# Altium PCB Remute-RF-FT.PcbDoc
Units mm, origin at the board's own origin, x right, y up, seen from the top; angles counter-clockwise.
Board outline 40 x 40 mm, 2 copper layers (Top Layer, Bottom Layer); 26 components, 25 nets, 70 pads, 0 vias.
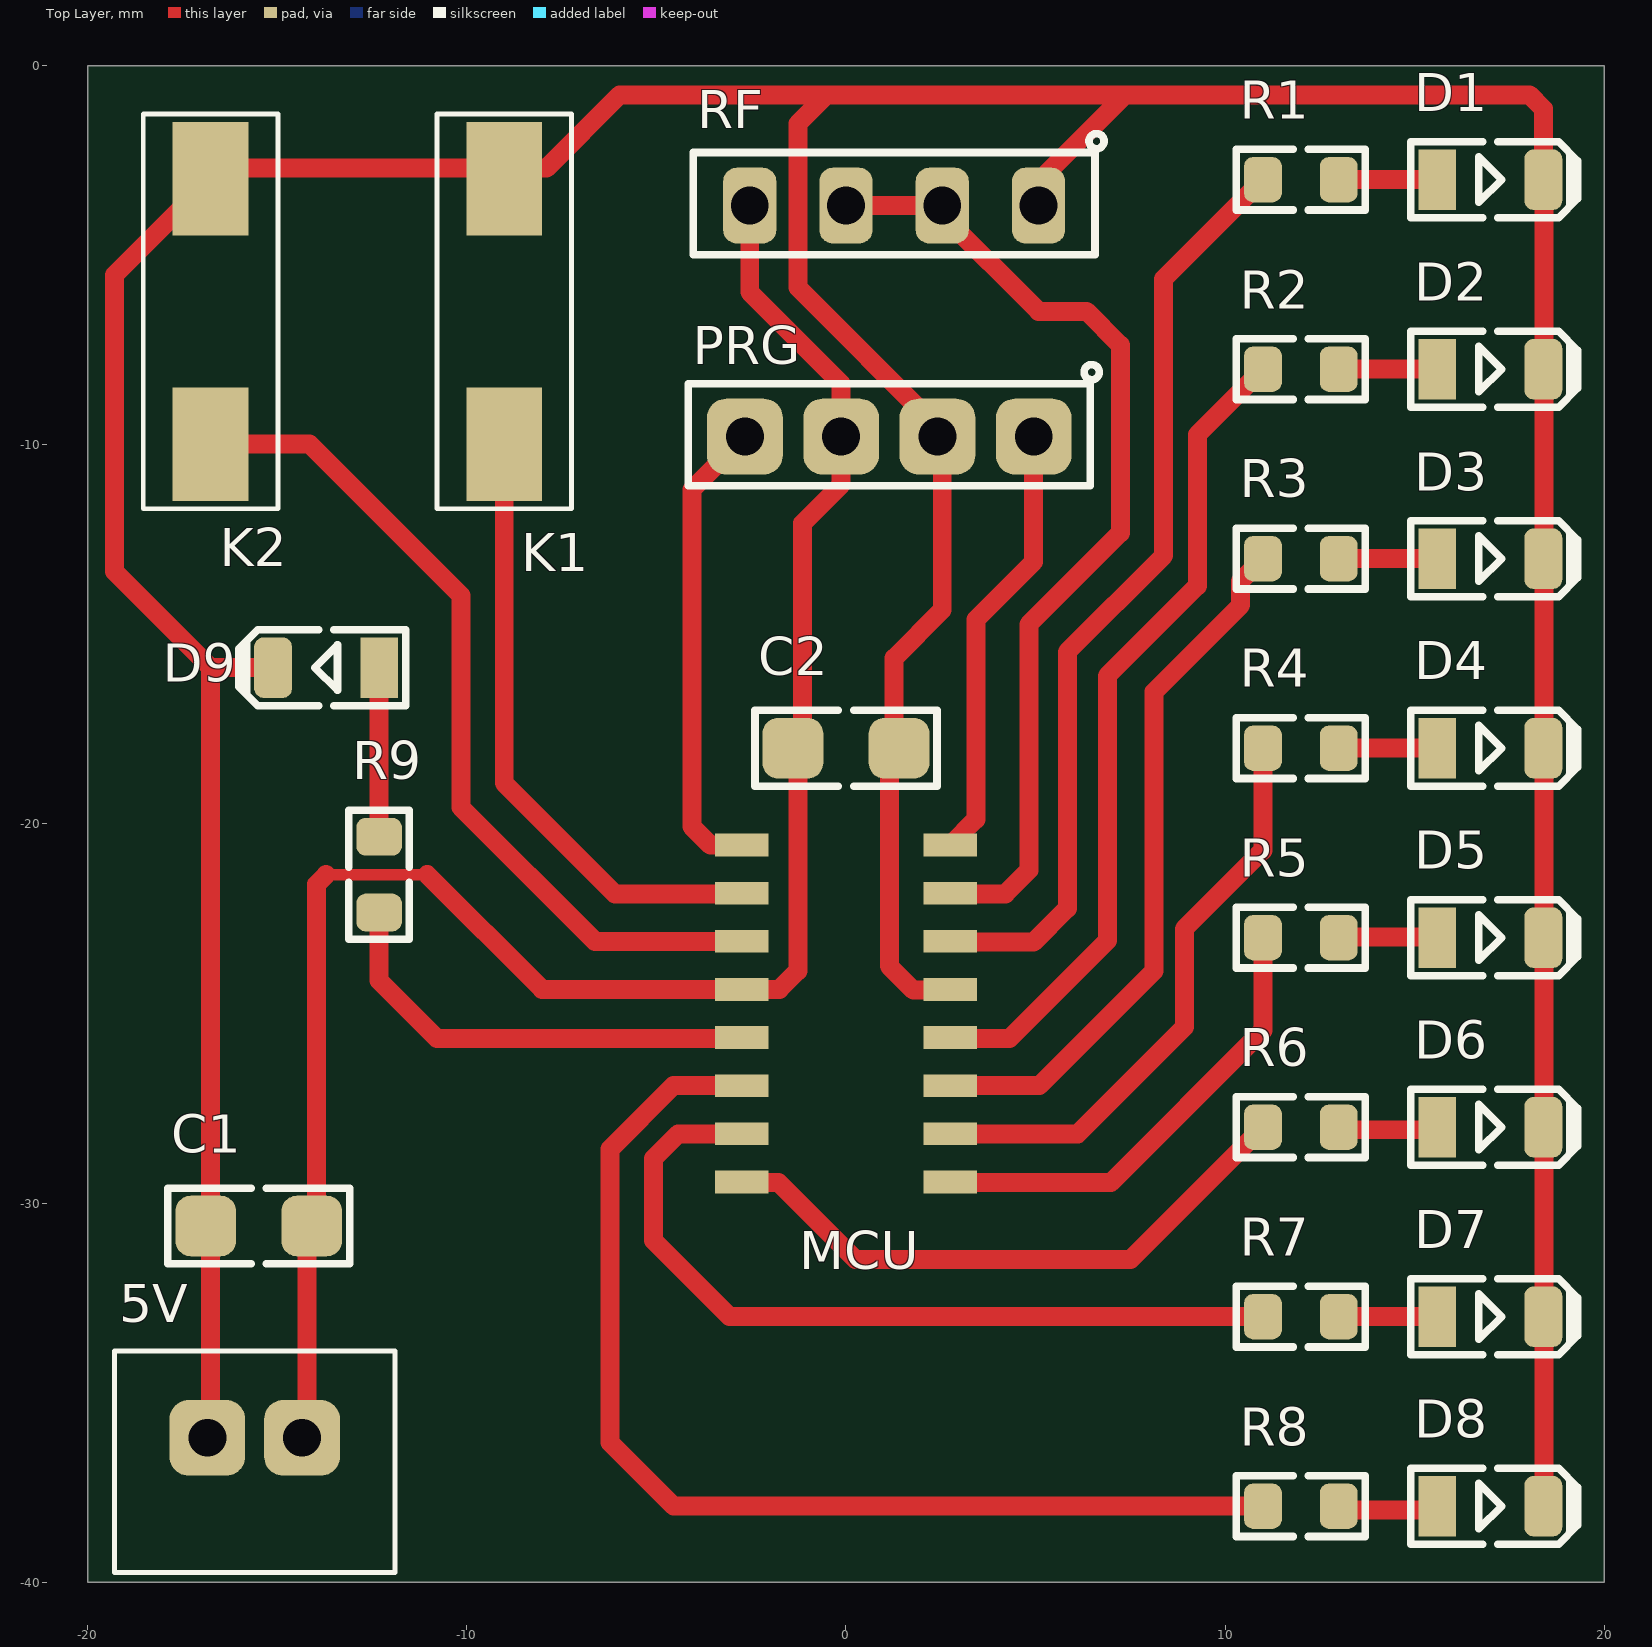
[diagram p0: Top Layer view]
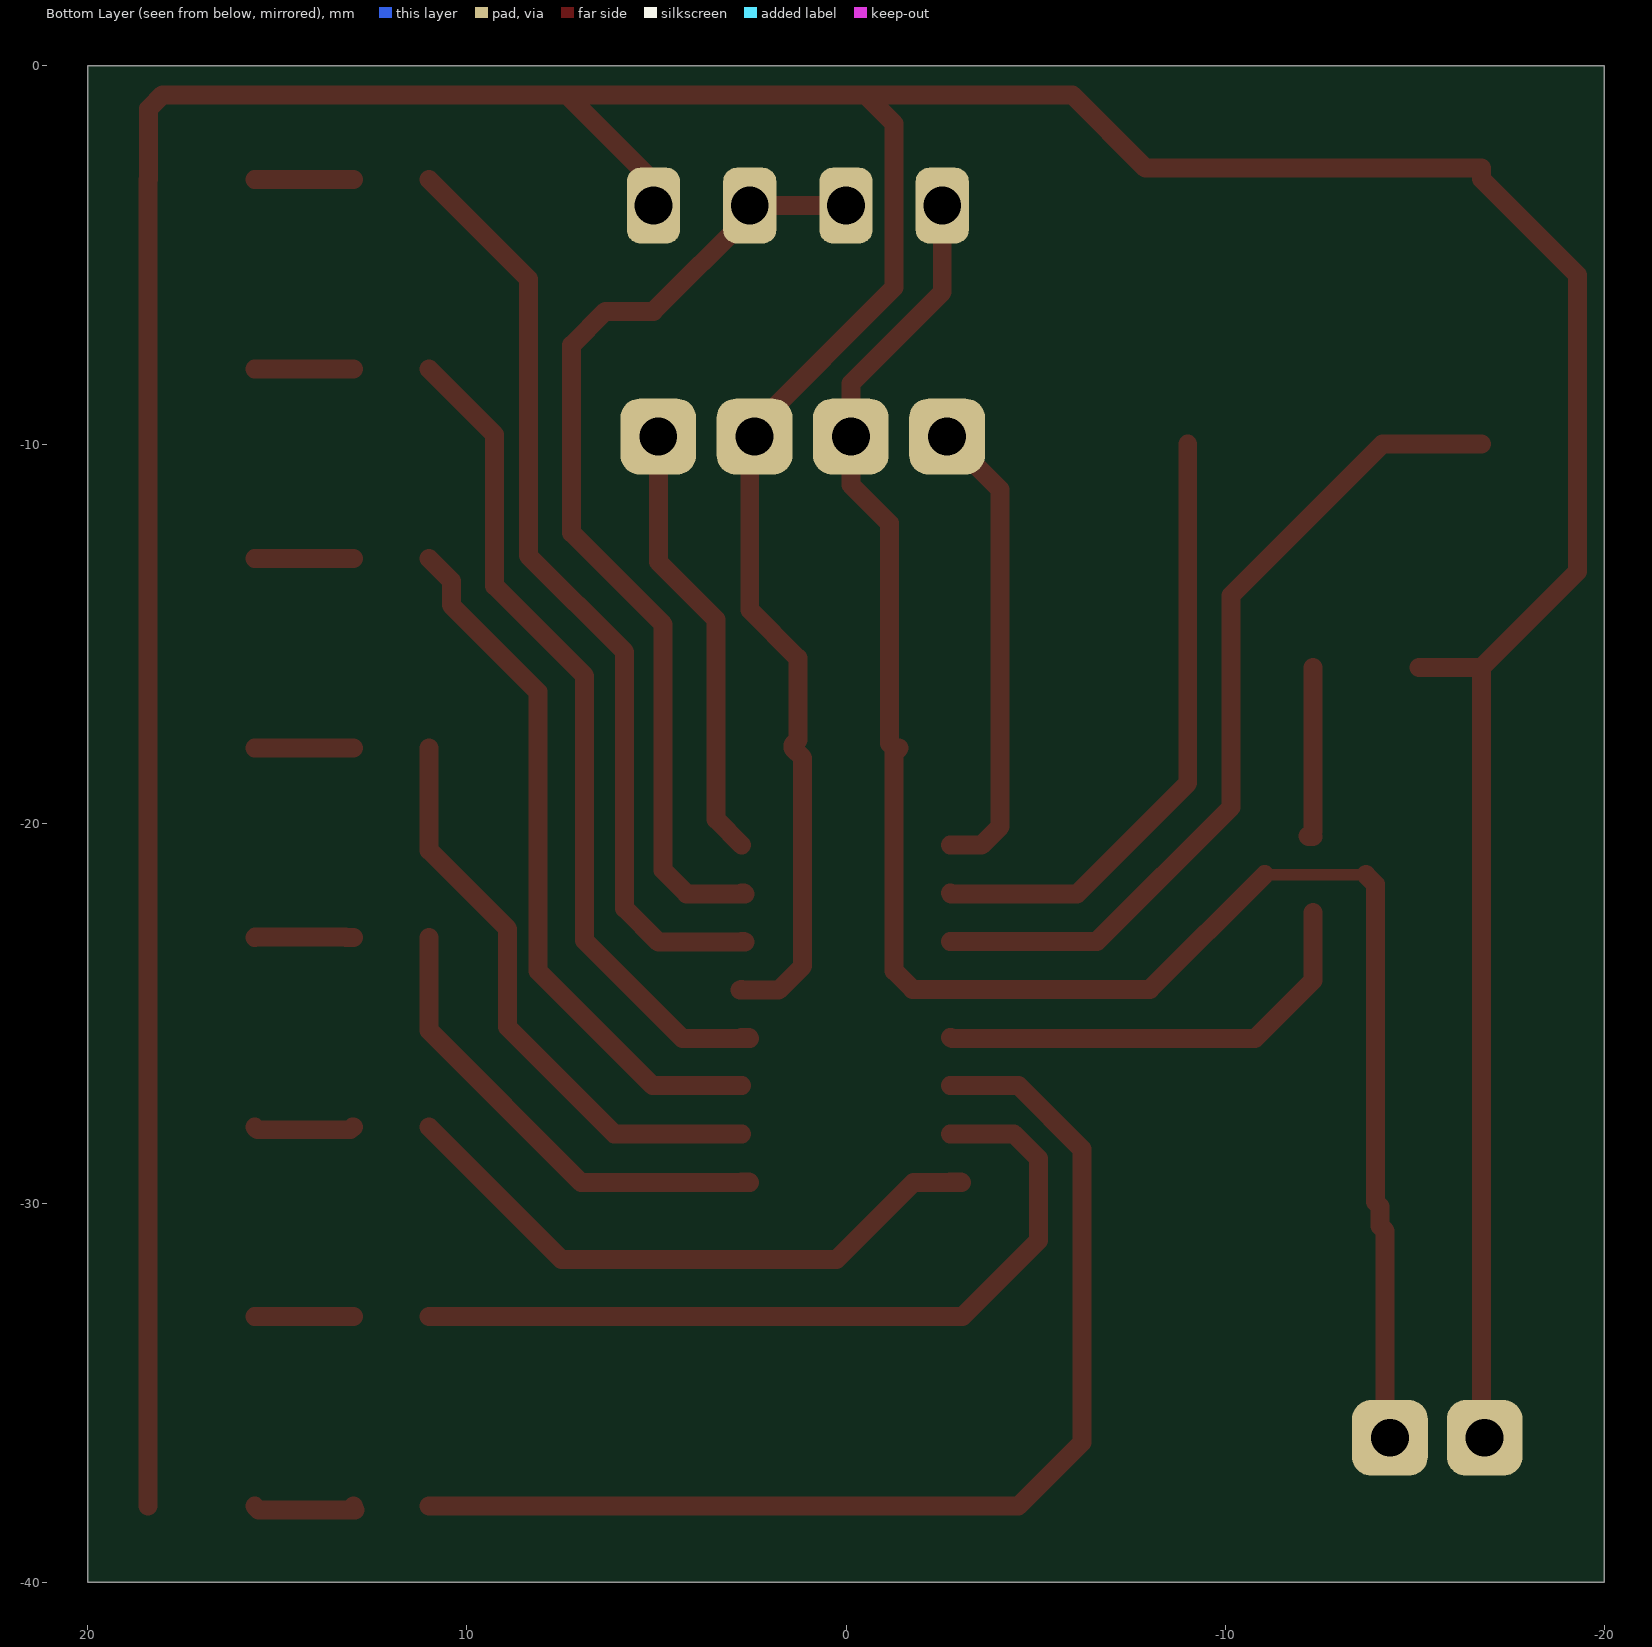
[diagram p1: Bottom Layer view, seen from below]

## Layer stack, top to bottom
Top Solder: solder mask 0.0102, Solder Resist, Dk 3.5
Top Layer: signal copper 0.0356
Dielectric 1: dielectric 0.32, FR-4, Dk 4.8
Bottom Layer: signal copper 0.0356
Bottom Solder: solder mask 0.0102, Solder Resist, Dk 3.5

## Board outline
-20,-40 20,-40 20,0 -20,0

## Design rules (kind name [scope] priority, off if disabled: settings)
Clearance [All] p1: gap=0.3 ignorepadtopadclearanceinfootprint=FALSE
PolygonConnect [All] p1: connectstyle=Relief reliefconductorwidth=0.254 reliefentries=4 polygonreliefangle="90 Angle" airgapwidth=0.254
RoutingVias [All] p1: holewidth=0.711 width=1.27 viastyle="Through Hole" minholewidth=0.711 minwidth=1.27 maxholewidth=0.711 maxwidth=1.27
SolderMaskExpansion [All] p1: expansion=0.102 istentingtop=FALSE
Width [All] p1: maxlimit=0.5 minlimit=0.254 preferedwidth=0.3 toplayer_minwidth=0.3 bottomlayer_maxwidth=0.254 bottomlayer_prefwidth=0.254 minimp=50.000000 maximp=50.000000 favimp=50.000000
30 further rules are at their usual default settings.

## Components (designator, comment, footprint, x,y, rotation, side; value= is the part's Value field where it differs from the comment)
5V "XH 2" "XH 2 PIN ( White )" -15.601,-36.195 r0 top
C1 "Capacitor SMD 1206" C1206 -15.494,-30.607 r0 top value=100uF
C2 "Capacitor SMD 1206" C1206 0,-18 r180 top value=100nF
D1 "LED SMD 1206" "LED SMD 1206 (Blue)" 17,-3 r0 top
D2 "LED SMD 1206" "LED SMD 1206 (Blue)" 17,-8 r0 top
D3 "LED SMD 1206" "LED SMD 1206 (Blue)" 17,-13 r0 top
D4 "LED SMD 1206" "LED SMD 1206 (Blue)" 17,-18 r0 top
D5 "LED SMD 1206" "LED SMD 1206 (Blue)" 17,-23 r0 top
D6 "LED SMD 1206" "LED SMD 1206 (Blue)" 17,-28 r0 top
D7 "LED SMD 1206" "LED SMD 1206 (Blue)" 17,-33 r0 top
D8 "LED SMD 1206" "LED SMD 1206 (Blue)" 17,-38 r0 top
D9 "LED SMD 1206" "LED SMD 1206 (Blue)" -13.716,-15.875 r180 top
K1 "Button" BUTTON -9.017,-6.477 r90 top
K2 "Button" BUTTON -16.764,-6.477 r90 top
MCU "FT60E023" SSOP-16 0,-25 r0 top
PRG "Female Header Single 4" HDR_F_1X4#1 1.143,-9.779 r180 top
R1 "Resistor SMD 0805" R0805 12,-3 r0 top value=1K
R2 "Resistor SMD 0805" R0805 12,-8 r0 top value=1K
R3 "Resistor SMD 0805" R0805 12,-13 r0 top value=1K
R4 "Resistor SMD 0805" R0805 12,-18 r0 top value=1K
R5 "Resistor SMD 0805" R0805 12,-23 r0 top value=1K
R6 "Resistor SMD 0805" R0805 12,-28 r0 top value=1K
R7 "Resistor SMD 0805" R0805 12,-33 r0 top value=1K
R8 "Resistor SMD 0805" R0805 12,-38 r0 top value=1K
R9 "Resistor SMD 0805" R0805 -12.319,-21.336 r90 top value=1K
RF "Female Header Single 4" HDR_F_1X4#2 1.27,-3.683 r180 top

## Footprints (in the part's own frame and the unit in brackets; to place one, negate y for a bottom-side part, rotate by r counter-clockwise, add the part's x,y. Pads: shape width x height; smd on the part's side, far side on the other; paste and mask are expansions set on the pad)
BUTTON [mm] "KEY"
  rect 3x2 smd: 1(-3.5,0) 2(3.5,0)
  silkscreen extent -5.21,-1.78 5.21,1.78, body extent -5,-1.75 5,1.75, height 4.35
C1206 [mm] "CHIP Capacitor, 3.2X1.6mm, 1206 (Make www.tarahiboard.com)"
  rrect50% 1.6x1.6 smd mask+0.075: 1(-1.4,0) 2(1.4,0)
  silkscreen extent -2.4,-1 2.4,1, body extent -1.6,-0.8 1.6,0.8, height 1
HDR_F_1X4#1 [mm] "HEADER FEMALE pitch: 2.54mm (Make www.tarahiboard.com)"
  rrect50% 2x2 hole 1 mask+0.1: 1(-3.81,0) 2(-1.27,0) 3(1.27,0) 4(3.81,0)
  silkscreen extent -5.54,-1.9 5.3,1.3, body extent -5.2,-1.3 5.21,1.2, height 8.5
HDR_F_1X4#2 [mm] "HEADER FEMALE pitch: 2.54mm (Make www.tarahiboard.com)"
  rrect50% 1.4x2 hole 1 mask+0.1: 1(-3.81,0) 2(-1.27,0) 3(1.27,0) 4(3.81,0)
  silkscreen extent -5.54,-1.9 5.3,1.3, body extent -5.2,-1.3 5.21,1.2, height 8.5
"LED SMD 1206 (Blue)" [mm] "(Make www.tarahiboard.com)"
  rect 1x1.6 smd mask+0.075: 1(-1.4,0)
  rrect50% 1x1.6 smd mask+0.075: 2(1.4,0)
  silkscreen extent -2.1,-1 2.3,1, body extent -1.6,-0.8 1.6,0.8, height 0.68
R0805 [mm] "CHIP RESISTOR 1/8 WATT ,2.0X1.3mm, 0805, 2012 (Make www.tarahiboard.com)"
  rrect50% 1x1.2 smd mask+0.05: 1(-1,0) 2(1,0)
  Top Layer pour cut-out: -0.5,0.8 0.5,0.8 0.5,-0.8 -0.5,-0.8
  silkscreen extent -1.7,-0.8 1.7,0.8, body extent -1.15,-0.67 1.15,0.68, height 0.76
SSOP-16 [mm]
  rect 1.4x0.6 smd mask+0.062: 1(-2.75,4.445) 2(-2.75,3.175) 3(-2.75,1.905) 4(-2.75,0.635) 5(-2.75,-0.635) 6(-2.75,-1.905) 7(-2.75,-3.175) 8(-2.75,-4.445) 9(2.75,-4.445) 10(2.75,-3.175) 11(2.75,-1.905) 12(2.75,-0.635) 13(2.75,0.635) 14(2.75,1.905) 15(2.75,3.175) 16(2.75,4.445)
  body extent -3.12,-4.99 3.12,4.99, height 1.59
"XH 2 PIN ( White )" [mm] "(Make www.tarahiboard.com)"
  rrect50% 2x2 hole 1: 1(-1.25,0) 2(1.25,0)
  silkscreen extent -3.7,-3.56 3.7,2.29, body extent -3.7,-3.56 3.7,2.24, height 7

## Part data
5V: library part "Conector XH 2 Pin", "Conector XH 2 Pin", ComponentLink1Description=Tarahiboard, ComponentLink1URL=https://www.tarahiboard.com/product/library-pack, DatasheetVersion=2022
C1 C2: "Capacitor C SMD 1206", ComponentLink1Description=Tarahiboard, ComponentLink1URL=https://www.tarahiboard.com, DatasheetVersion=2022
K1 K2: library part BUTTON-6.3.4-SMD, Actuator Color=Brown, Contact Current Rating=50mA, Contact Resistance=100mR, Manufacturer=Panasonic, Manufacturer Part Number=EVQ-PE605T, Max Operating Temperature=85°C, Max Voltage Rating (DC)=12V, Min Operating Temperature=-30°C, Operating Force=2.4N, Package Quantity=1000, Supplier Part Number 1=P13592S-ND, Actuator Length=1.5mm, Actuator Type=Standard, Category="Tactile Switches", ComponentLink1Description=https://datasheet.ciiva.com/25603/0900766b810ad3e5-25603911.pdf?src-supplier=RSComponents, ComponentLink1URL=https://datasheet.ciiva.com/25603/0900766b810ad3e5-25603911.pdf?src-supplier=RSComponents, ComponentLink2Description=https://datasheet.ciiva.com/30091/atv0000ce8-30091136.pdf?src-supplier=Onlinecomponents.com, ComponentLink2URL=https://datasheet.ciiva.com/30091/atv0000ce8-30091136.pdf?src-supplier=Onlinecomponents.com, ComponentLink3Description=https://datasheet.ciiva.com/16377/atk0000ce35-16377527.pdf?src-supplier=Future+Electronics, ComponentLink3URL=https://datasheet.ciiva.com/16377/atk0000ce35-16377527.pdf?src-supplier=Future+Electronics, ComponentLink4Description=https://datasheet.ciiva.com/16155/atv0000ce8-16155306.pdf?src-supplier=Onlinecomponents.com, ComponentLink4URL=https://datasheet.ciiva.com/16155/atv0000ce8-16155306.pdf?src-supplier=Onlinecomponents.com, Contact Plating=Silver, Current Rating=50mA, Electrical Life=30000Cycles, Illumination Type=Non-Illuminated,Illuminated, Lead Free="Lead Free", Mechanical Life=30000Cycles, Mount="Through Hole", Orientation=Straight, Packaging=Bulk, Pricing 1="1=0.42000, 10=0.41000, 25=0.38600, 100=0.33510, 250=0.30400, 500=0.28280, 1000=0.25452, 2500=0.23897, 5000=0.22200 (USD)", REACH SVHC="No SVHC", RoHS=Yes, RoHS Compliant=Yes, Series=EVQPE, Size=3.5mm, Stock 1=1845, Supplier 1=Digi-Key, Supplier 2=Digi-Key, Switch Function=Off-Mom, Switch Travel=0.25mm, Termination="PC Pin", Throw Configuration=SPST, Voltage Rating (DC)=12V
PRG RF: "Female, pitch: 2.54mm", ComponentLink1Description=Tarahiboard, ComponentLink1URL=https://www.tarahiboard.com/product/library-pack, DatasheetVersion=2022
D1 D2 D3 D4 D5 D6 D7 D8 D9: ComponentLink1Description=Tarahiboard, ComponentLink1URL=https://www.tarahiboard.com/product/library-pack, DatasheetVersion=2022
R1 R2 R3 R4 R5 R6 R7 R8 R9: ComponentLink1Description="Website: Tarahiboard", ComponentLink1URL=https://www.tarahiboard.com/product/library-pack, DatasheetVersion=2022

## Nets (pads, with @x,y where several pads share a name; then routed paths per layer and width w, separated by ;. In a path a pad name is that pad's centre, name@x,y a point inside that pad or via, vN(x,y) a via of type N, cw(c..) or ccw(c..) an arc to the next point about the centre after c; other vN are vias at no path point)
CLK: MCU.16 PRG.1 | length 11.7
  Top Layer w0.5: MCU.16 3.429,-19.876 3.429,-14.605 4.953,-13.081 PRG.1
DAT: MCU.1 PRG.4 | length 12.4
  Top Layer w0.5: MCU.1 -3.575,-20.555 -4.064,-20.066 -4.064,-11.176 PRG.4
DATA: MCU.15 RF.2 RF.3 | length 26.3
  Top Layer w0.5: RF.3 RF.2 2.54,-3.937 5.08,-6.477 6.35,-6.477 7.239,-7.366 7.239,-12.319 4.826,-14.732 4.826,-21.221 4.203,-21.844 2.667,-21.844 2.686,-21.825 MCU.15
GND: 5V.1 C1.1 C2.1 D1.2 D2.2 D3.2 D4.2 D5.2 D6.2 D7.2 D8.2 D9.2 K1.2 K2.2 MCU.13 PRG.2 RF.1 | length 141.9
  Top Layer w0.5: 5V.1 -16.851,-36.235 -16.764,-36.322 -16.764,-16.002 -16.637,-15.875 D9.2 ; -16.764,-15.875 -19.304,-13.335 -19.304,-5.517 K2.2 -16.764,-2.695 -7.902,-2.695 -5.969,-0.762 -0.508,-0.762 ; MCU.13 2.775,-24.365 2.794,-24.384 1.778,-24.384 1.143,-23.749 1.143,-18.257 C2.1 1.4,-17.91 1.27,-17.78 1.27,-15.621 2.54,-14.351 2.54,-9.906 PRG.2 2.413,-9.525 -1.27,-5.842 -1.27,-1.524 -0.508,-0.762 ; RF.1 5.207,-3.556 5.207,-2.921 7.366,-0.762 ; D1.2 18.4,-1.128 18.034,-0.762 7.366,-0.762 ; D8.2@18.415,-38 18.415,-23 18.415,-18 D1.2@18.415,-3 ; -0.508,-0.762 7.366,-0.762
KEY1: K1.1 MCU.2 | length 16.4
  Top Layer w0.5: K1.1 -9.017,-18.923 -6.096,-21.844 -2.769,-21.844 MCU.2
KEY2: K2.1 MCU.3 | length 22.7
  Top Layer w0.5: K2.1 -14.153,-9.977 -10.16,-13.97 -10.16,-19.558 -6.623,-23.095 MCU.3
L1: MCU.14 R1.1 | length 25
  Top Layer w0.5: MCU.14 2.686,-23.095 2.667,-23.114 4.953,-23.114 5.842,-22.225 5.842,-15.459 8.382,-12.919 8.382,-5.618 R1.1
L2: MCU.12 R2.1 | length 22.4
  Top Layer w0.5: MCU.12 2.559,-25.635 2.54,-25.654 4.318,-25.654 6.896,-23.076 6.896,-21.413 6.896,-16.091 9.271,-13.716 9.271,-9.729 R2.1
L3: MCU.11 R3.1 | length 18.7
  Top Layer w0.5: MCU.11 5.099,-26.905 8.128,-23.876 8.128,-16.51 10.414,-14.224 10.414,-13.586 R3.1
L4: MCU.10 R4.1 | length 15.6
  Top Layer w0.5: MCU.10 6.115,-28.175 8.928,-25.362 8.928,-22.767 11,-20.695 R4.1
L5: MCU.9 R5.1 | length 12.8
  Top Layer w0.5: MCU.9 2.559,-29.445 2.54,-29.464 6.985,-29.464 11,-25.449 R5.1
L6: MCU.8 R6.1 | length 16.6
  Top Layer w0.5: MCU.8 -3.029,-29.445 -3.048,-29.464 -1.778,-29.464 0.254,-31.496 7.504,-31.496 R6.1
L7: MCU.7 R7.1 | length 21.7
  Top Layer w0.5: MCU.7 -4.426,-28.175 -5.08,-28.829 -5.08,-30.988 -3.068,-33 R7.1
L8: MCU.6 R8.1 | length 29.8
  Top Layer w0.5: MCU.6 -4.553,-26.905 -6.223,-28.575 -6.223,-36.322 -4.545,-38 R8.1
L9: MCU.5 R9.1 | length 12
  Top Layer w0.5: R9.1 -12.319,-24.13 -10.795,-25.654 -2.794,-25.654 -2.775,-25.635 MCU.5
NetD1_1: D1.1 R1.2 | length 2.6
  Top Layer w0.5: R1.2 D1.1
NetD2_1: D2.1 R2.2 | length 2.6
  Top Layer w0.5: R2.2 D2.1
NetD3_1: D3.1 R3.2 | length 2.6
  Top Layer w0.5: R3.2 D3.1
NetD4_1: D4.1 R4.2 | length 2.6
  Top Layer w0.5: R4.2 D4.1
NetD5_1: D5.1 R5.2 | length 2.6
  Top Layer w0.5: R5.2 13.195,-23 13.208,-22.987 15.587,-22.987 D5.1
NetD6_1: D6.1 R6.2 | length 2.7
  Top Layer w0.5: R6.2 13.014,-28 13.081,-28.067 15.533,-28.067 D6.1
NetD7_1: D7.1 R7.2 | length 2.6
  Top Layer w0.5: R7.2 D7.1
NetD8_1: D8.1 R8.2 | length 2.8
  Top Layer w0.5: R8.2 13,-38.054 12.954,-38.1 15.5,-38.1 D8.1
NetD9_1: D9.1 R9.2 | length 4.6
  Top Layer w0.5: R9.2 -12.208,-20.336 -12.192,-20.32 -12.316,-20.196 D9.1
VCC: 5V.2 C1.2 C2.2 MCU.4 PRG.3 RF.4 | length 50.8
  Top Layer w0.3: 5V.2 -14.351,-36.068 5V.2@-14.224,-35.941 ; -13.716,-21.336 -11.049,-21.336
  Top Layer w0.5: 5V.2@-14.224,-35.941 -14.224,-30.737 C1.2 -14.094,-30.096 -13.97,-29.972 -13.97,-21.59 -13.716,-21.336 ; -11.049,-21.336 -8.02,-24.365 MCU.4 -1.759,-24.365 -1.27,-23.876 -1.27,-18.13 C2.2@-1.335,-18.065 ; RF.4 -2.54,-5.969 -0.127,-8.382 PRG.3 -0.127,-11.049 -1.143,-12.065 -1.143,-17.873 C2.2@-1.335,-18.065 ; C2.2 C2.2@-1.335,-18.065

## Silkscreen, mask and mechanical layers (free items; w line width, h text height)
Mechanical 13:
  the board outline again, w0.1